# Altium PCB LEDSEQUENCER.PcbDoc
Units mm, origin at the board's own origin, x right, y up, seen from the top; angles counter-clockwise.
Board outline 60 x 23 mm, 2 copper layers (Top Layer, Bottom Layer), stack 1.671 mm thick; 28 components, 26 nets, 77 pads, 18 vias.
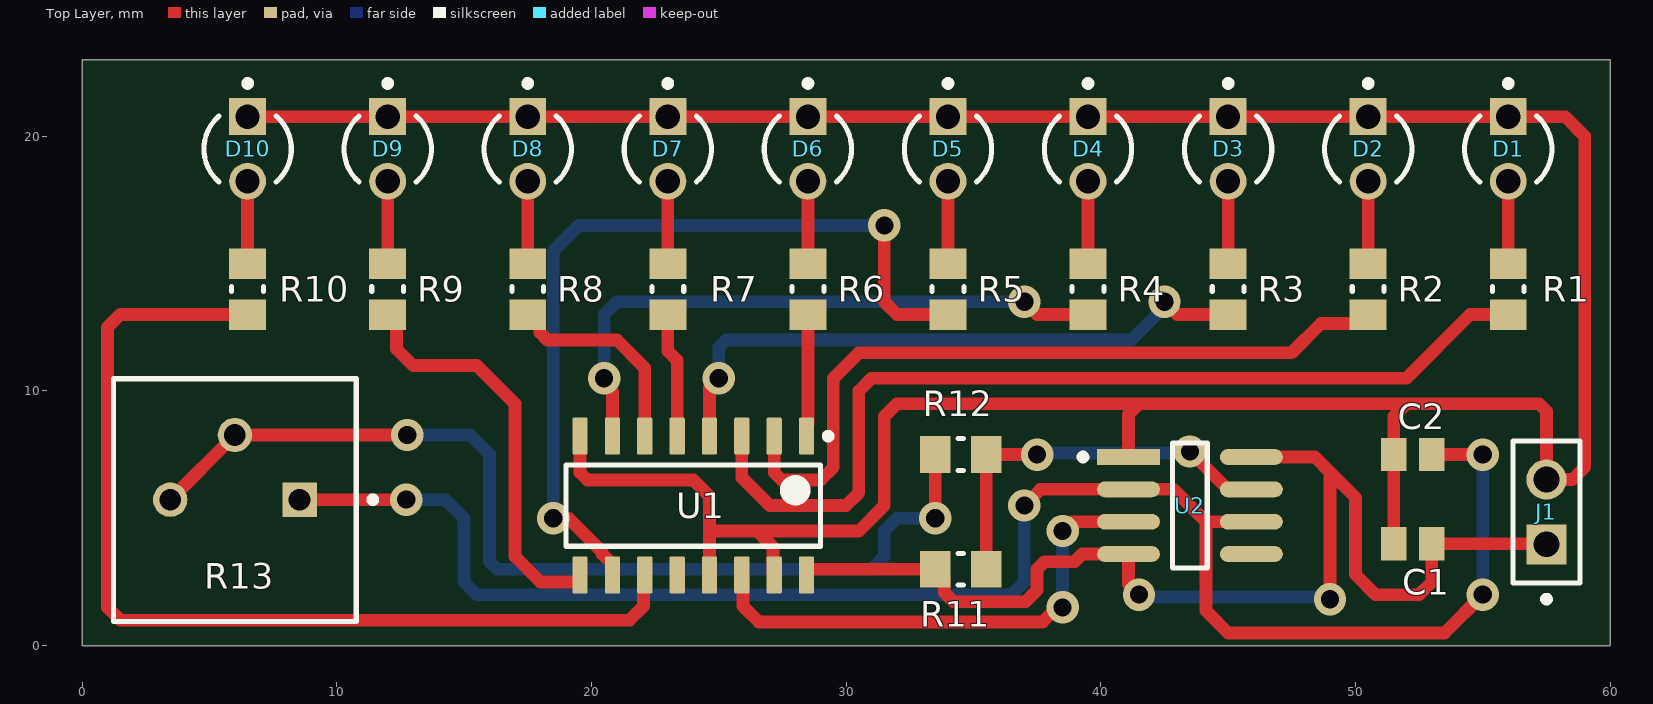
[diagram p0: Top Layer view]
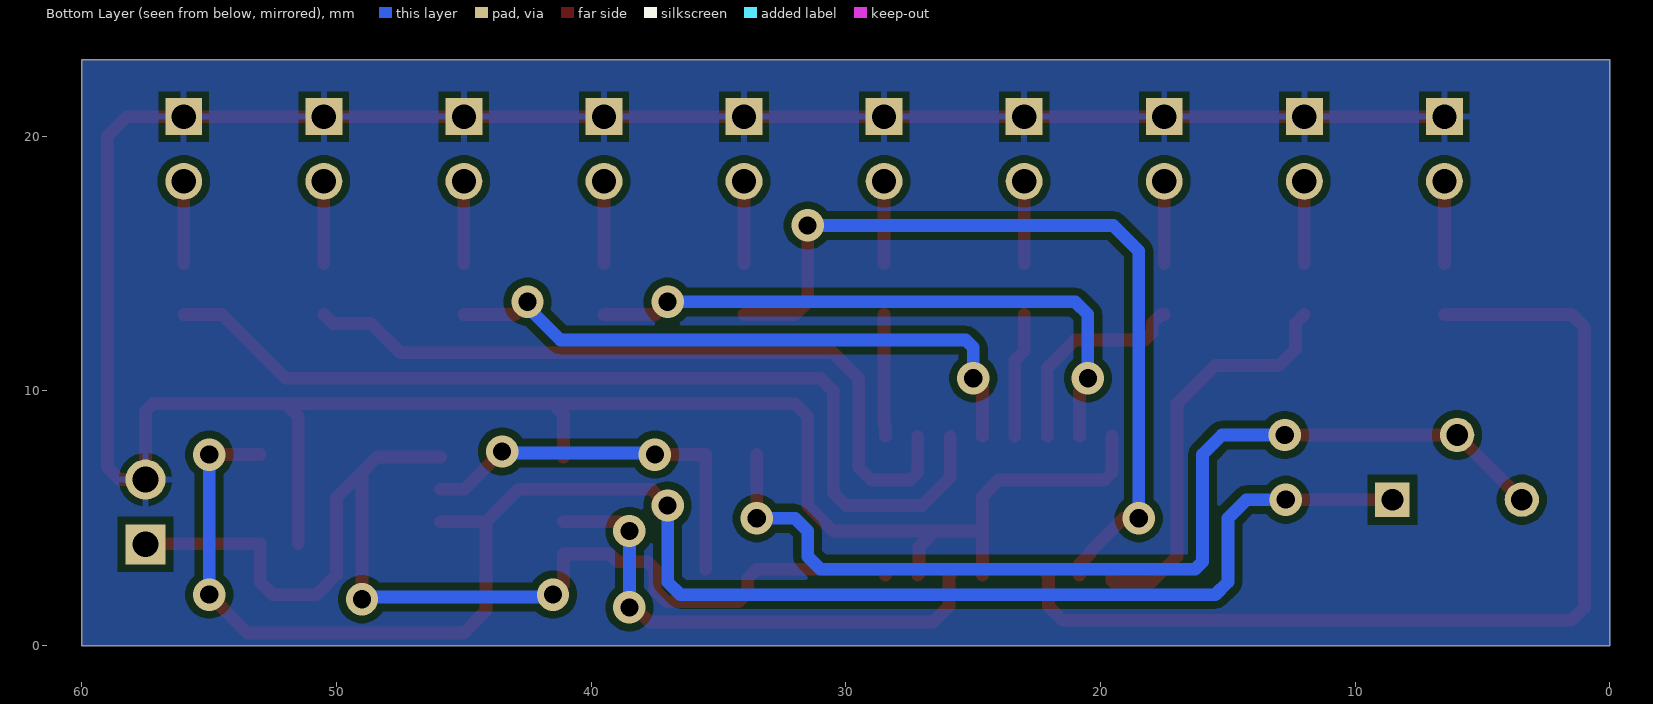
[diagram p1: Bottom Layer view, seen from below]
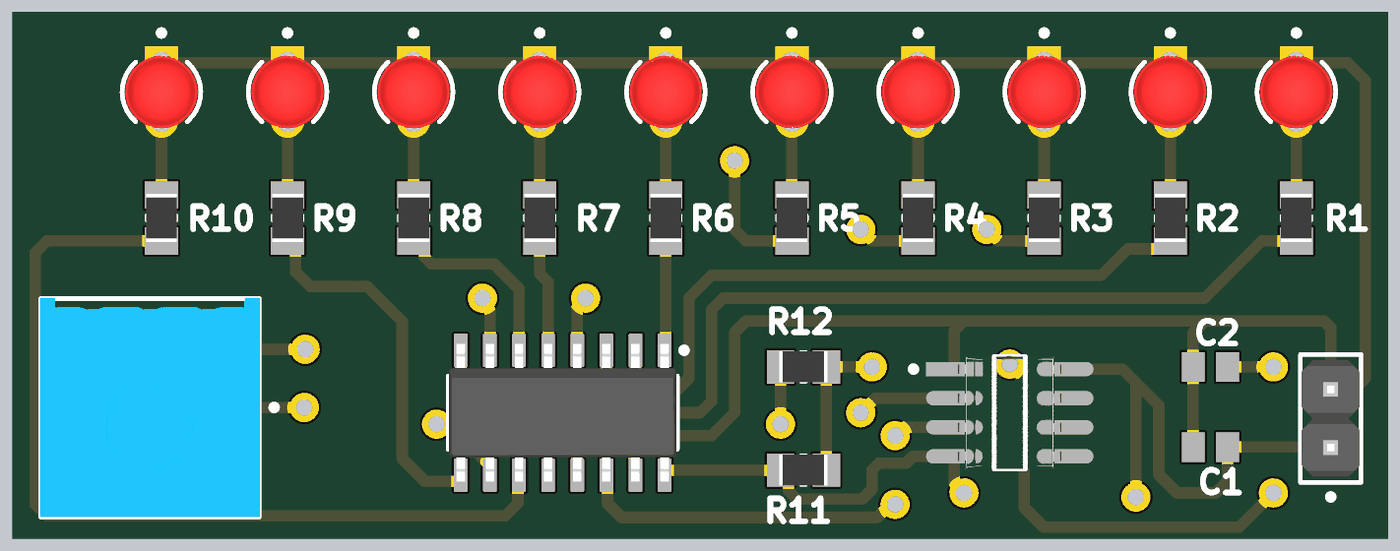
[diagram p2: 3D render of the assembled board from above, using the file's embedded part models]

## Layer stack, top to bottom
Top Solder: solder mask 0.0102, Solder Resist, Dk 3.5
Top Layer: signal copper 0.0356
Dielectric 1: dielectric 1.6, FR-4, Dk 4.8
Bottom Layer: signal copper 0.0356
Bottom Solder: solder mask 0.0102, Solder Resist, Dk 3.5

## Board outline
0,0 60,0 60,23 0,23

## Design rules (kind name [scope] priority, off if disabled: settings)
Clearance [All] p1: gap=0.3 ignorepadtopadclearanceinfootprint=FALSE
PolygonConnect [All] p1: connectstyle=Relief reliefconductorwidth=0.254 reliefentries=4 polygonreliefangle="90 Angle" airgapwidth=0.254
RoutingVias [All] p1: holewidth=0.3 width=0.6 viastyle="Through Hole" minholewidth=0.3 minwidth=0.6 maxholewidth=0.3 maxwidth=0.6
SilkToSolderMaskClearance [IsPad] p1: minsilkscreentomaskgap=0.1 clearancetoexposedcopper=TRUE
SolderMaskExpansion [All] p1: expansion=0.102 istentingtop=FALSE
UnRoutedNet [All] p1: checkbadconnections=TRUE
Width [All] p1: maxlimit=1 minlimit=0.3 preferedwidth=0.5
28 further rules are at their usual default settings.

## Components (designator, comment, footprint, x,y, rotation, side; value= is the part's Value field where it differs from the comment)
C1 "1uf" CAPC2013X135X45LL10T25 52.25,4 r0 top
C2 "1uf" CAPC2013X135X45LL10T25 52.25,7.5 r0 top
D1 "HLMP-1301" FP-HLMP-1301-MFG 56,19.5 r270 top
D2 "HLMP-1301" FP-HLMP-1301-MFG 50.5,19.5 r270 top
D3 "HLMP-1301" FP-HLMP-1301-MFG 45,19.5 r270 top
D4 "HLMP-1301" FP-HLMP-1301-MFG 39.5,19.5 r270 top
D5 "HLMP-1301" FP-HLMP-1301-MFG 34,19.5 r270 top
D6 "HLMP-1301" FP-HLMP-1301-MFG 28.5,19.5 r270 top
D7 "HLMP-1301" FP-HLMP-1301-MFG 23,19.5 r270 top
D8 "HLMP-1301" FP-HLMP-1301-MFG 17.5,19.5 r270 top
D9 "HLMP-1301" FP-HLMP-1301-MFG 12,19.5 r270 top
D10 "HLMP-1301" FP-HLMP-1301-MFG 6.5,19.5 r270 top
J1 "M20-9990246" FP-M20-9990246-MFG 57.5,5.25 r90 top
R1 "RC0805FR-071KL" RESC2013X60X35ML10T20 56,14 r90 top
R2 "RC0805FR-071KL" RESC2013X60X35ML10T20 50.5,14 r90 top
R3 "RC0805FR-071KL" RESC2013X60X35ML10T20 45,14 r90 top
R4 "RC0805FR-071KL" RESC2013X60X35ML10T20 39.5,14 r90 top
R5 "RC0805FR-071KL" RESC2013X60X35ML10T20 34,14 r90 top
R6 "RC0805FR-071KL" RESC2013X60X35ML10T20 28.5,14 r90 top
R7 "RC0805FR-071KL" RESC2013X60X35ML10T20 23,14 r90 top
R8 "RC0805FR-071KL" RESC2013X60X35ML10T20 17.5,14 r90 top
R9 "RC0805FR-071KL" RESC2013X60X35ML10T20 12,14 r90 top
R10 "RC0805FR-071KL" RESC2013X60X35ML10T20 6.5,14 r90 top
R11 "2k2" RESC2013X60X35ML10T20 34.5,3 r180 top
R12 "10k" RESC2013X60X35ML10T20 34.5,7.5 r0 top
R13 "50k" BOUR-3386P 6,7 r180 top
U1 "CD4017BM" D0016A_N 24,5.5 r270 top
U2 "NE555DR" FP-D0008A-IPC_A 43.5,5.5 r0 top

## Footprints (in the part's own frame and the unit in brackets; to place one, negate y for a bottom-side part, rotate by r counter-clockwise, add the part's x,y. Pads: shape width x height; smd on the part's side, far side on the other; paste and mask are expansions set on the pad)
BOUR-3386P [mm] "THD, 3-Leads, Body 9.53x9.53mm, Pitch 2.54mm"
  rect 1.35x1.35 hole 0.85: 1(-2.54,1.27)
  round 1.35 hole 0.85: 2(0,-1.27) 3(2.54,1.27)
  silkscreen extent -5.54,-3.48 4.76,6.05, body extent -4.79,-3.52 4.79,6.06, height 4.95
CAPC2013X135X45LL10T25 [mm] "Chip Capacitor, 2-Leads, Body 2.00x1.25mm, IPC High Density"
  rect 1x1.3 smd: 1(-0.75,0) 2(0.75,0)
  body extent -1.05,-0.67 1.05,0.68, height 1.35
D0016A_N [mm] "SOIC, 16-Leads, Body 10x4mm, Pitch 1.27mm, IPC Medium Density"
  rrect17% 1.45x0.6 smd: 1(-2.725,4.445) 2(-2.725,3.175) 3(-2.725,1.905) 4(-2.725,0.635) 5(-2.725,-0.635) 6(-2.725,-1.905) 7(-2.725,-3.175) 8(-2.725,-4.445) 9(2.725,-4.445) 10(2.725,-3.175) 11(2.725,-1.905) 12(2.725,-0.635) 13(2.725,0.635) 14(2.725,1.905) 15(2.725,3.175) 16(2.725,4.445)
  silkscreen extent -2.85,-5 1.6,5.42, body extent -3,-4.95 3,4.95, height 1.59
FP-D0008A-IPC_A [mm]
  rect 2.469x0.622 smd paste+0 mask+0: 1(-2.414,1.905)
  rrect100% 2.469x0.622 smd paste+0 mask+0: 2(-2.414,0.635) 3(-2.414,-0.635) 4(-2.414,-1.905) 5(2.414,-1.905) 6(2.414,-0.635) 7(2.414,0.635) 8(2.414,1.905)
  silkscreen extent -4.32,-2.45 0.68,2.45, body extent -4.15,-2.95 4.15,2.95, height 0.25
FP-HLMP-1301-MFG [mm]
  rect 1.45x1.45 hole 0.95 paste-1000 mask+0: 1(-1.27,0)
  round 1.45 hole 0.95 paste-1000 mask+0: 2(1.27,0)
  silkscreen extent -2.7,-1.71 1.3,1.71, body extent -2.22,-2.22 2.22,2.22, height 0.25
FP-M20-9990246-MFG [mm]
  rect 1.57x1.57 hole 1.02 paste-1000 mask+0: 1(-1.27,0)
  round 1.57 hole 1.02 paste-1000 mask+0: 2(1.27,0)
  silkscreen extent -3.55,-1.32 2.79,1.32, body extent -2.89,-1.42 2.89,1.42, height 0.25
RESC2013X60X35ML10T20 [mm] "Chip Resistor, 2-Leads, Body 2.1x1.35mm, IPC Low Density"
  rect 1.2x1.45 smd: 1(-1,0) 2(1,0)
  silkscreen extent -0.1,-0.63 0.1,0.63, body extent -1.05,-0.68 1.05,0.67, height 0.6

## Part data
C1 C2: library part CMP-1036-04761-2, Manufacturer=Murata, Part Number=GRM21BR71H105KA12L
D1 D2 D3 D4 D5 D6 D7 D8 D9 D10: library part CMP-18399-000007-1, "LED RED DIFFUSED T-1 T/H", Colour=Red, Forward Current=10mA, Forward Voltage=1.9V, Manufacturer=Broadcom, Max Junction Temp=+110°C, Package=0, Reverse Voltage=5V, Temperature="-40°C to +100°C", Temperature Range High=+100°C, Temperature Range Low=-40°C, Automotive=No, Category=Diode, ComponentLink2Description=Datasheet, ComponentLink2URL=https://docs.broadcom.com/docs/AV02-1555EN, Device Class L1=Optoelectronics, Device Class L2=LEDs, Device Class L3=unset, Digikey Description="LED RED DIFFUSED T-1 T/H", Lead Free=Yes, Led Orientation=Straight, Luminous Intensity=3.4mcd, Manufacturer Part Number=HLMP-1301, Mouser Description="Standard LEDs - Through Hole Red Diffused 635nm 3.4mcd", Octopart=https://octopart.com/hlmp-1301-broadcom-71130345, Peak Emmision Wavelength=635nm, RoHS=TRUE, Viewing Angle=60°, Wavelength=626nm
J1: library part CMP-15831-000009-1, "CONN HEADER VERT 2POS 2.54MM", Current Rating=3A, Manufacturer=Harwin, Temperature="-40°C to +105°C", Temperature Range High=+105°C, Temperature Range Low=-40°C, Automotive=No, Category=Conn, ComponentLink2Description=Datasheet, ComponentLink2URL=https://cdn.harwin.com/pdfs/M20-999.pdf, Conn Gender=Male, Conn Orientation=Vertical, Contact Material=Tin,Nickel, Device Class L1=Connectors, Device Class L2="Headers and Wire Housings", Device Class L3=unset, Digikey Description="CONN HEADER VERT 2POS 2.54MM", Height=8.99mm, Lead Free=Yes, Manufacturer Part Number=M20-9990246, Mouser Description="2.54mm (0.1\") Pitch SIL Vertical PC Tail Pin Header, 6.1mm mating pin height, tin, 2 contacts", Number Of Contacts=2, Number Of Rows=1, Octopart=https://octopart.com/m20-9990246-harwin-2590635, Package=M20-9990246, Pitch=2.54mm, RoHS=TRUE
R1 R2 R3 R4 R5 R6 R7 R8 R9 R10 R11 R12: library part CMP-2100-03671-1, "Chip Resistor, 1 KOhm, +/- 1%, 125 mW, -55 to 155 degC, 0805 (2012 Metric), RoHS, Tape and Reel", Case Code (Imperial)=0805, Case Code (Metric)=2012, Manufacturer=Yageo, Max Operating Temperature=155degC, Max Power Dissipation=125mW, Min Operating Temperature=-55degC, Package Description="2-Pin Surface Mounted Device, Body 2 x 1.25 mm", Package Quantity=1, Resistance=1KOhm, Temperature Coefficient=100ppm/degreesC, Tolerance=1%, Voltage Rating=150V, Case/Package=0805, Composition=ThickFilm, Datasheet URL=http://www.yageo.com/NewPortal/yageodocoutput?fileName=/pdf/R-Chip/PYu-RC_Group_51_RoHS_L_5.pdf, Datasheet Version="Rev. 5, 10/2016", Depth=1.25mm, Height=0.024inch, Lead Free=LeadFree, Length=0.079inch, Manufacturer URL=http://www.yageo.com/, Military Standard=Not, Number of Pins=2, Number of Terminations=2, Package Reference=0805, Packaging=TapeandReel, Power Rating=125mW, REACH SVHC=Unknown, RoHSCompliant=true, Termination=SMD/SMT, Voltage Rating (DC)=150V, Width=0.049inch
R13: library part CMP-2000-05592-1, "Square Trimpot(R) Trimming Potentiometer, 100 KOhm, +/- 10%, 0.5 W, -55 to 125 degC, 3-Pin THD, RoHS, Tube", Manufacturer=Bourns, Manufacturer Series=3386, Maximum Operating Temperature=125C, Minimum Operating Temperature=-55C, Operating Temperature-Max (Cel)=125, Operating Temperature-Min (Cel)=-55, Package=RectangularPackage, Package Description="3-Pin Through Hole Device, Body 9.53 x 9.53 mm, Pitch 2.54 mm", Package Reference=3386P, Power Rating=1/2W, Rated Power Dissipation (P) (W)=0.5, Rated Temperature (Cel)=85, Resistance (ohm)=100000, Resistance Law=Linear, Resistance Value=100KOhm, Resistive Element Material=Cermet, Temperature Coefficient=100ppm/C, Tolerance=10%, Tolerance (%)=10, Actuator Orientation=Vertical, Actuator Type=Screw, Datasheet URL=http://www.bourns.com/docs/Product-Datasheets/3386.pdf, Datasheet Version=05/2016, Family=3386, Lead Free=NO, Manufacturer URL=http://www.bourns.com/, Mounting=ThroughHole, Mounting Feature=ThroughHole, Mounting Technology=ThroughHole, Number of Terminals=3, Number of Turns=1, Packaging=Tube, Product Depth=9.53mm, Product Height=4.83mm, Product Length=9.53mm, Product Type=Potentiometer, Shaft Diameter=3.15mm, Technology=Cermet, Terminal Finish=TINLEAD, Terminal Shape=WIRE, Termination Style=Pin, Type=Trimmer
U1: library part CMP-1623-00071-2, "CMOS Decade Counter with 10 Decoded Outputs, D0016A, TUBE", F @ Nom Voltage(Max)(Mhz)=8, Generic Part Number=CD4017B, ICC @ Nom Voltage(Max)(mA)=0.03, Manufacturer="Texas Instruments", Operating Temperature Range(C)="-55 to 125", Rating=Military, tpd @ Nom Voltage(Max)(ns)=270, Voltage(Nom)(V)=10, Bits(#)=10, Code_JEDEC="MS-012 variation AC", DatasheetVersion=SCHS027C, Function=Counter, Input Type=CMOS, Inputs=1, Output Drive (IOL/IOH)(Max)(mA)=1.5/-1.5, Output Type=CMOS, PackageReference=D0016A, Schmitt Trigger=No, Technology Family=CD4000, Type=Decade, VCC(Max)(V)=18, VCC(Min)(V)=3
U2: library part CMP-1685-00007-2, "IC OSC SGL TIMER 100KHZ 8-SOIC", Case/Package=SOIC, Frequency=100kHz, High Level Output Current=-200mA, Low Level Output Current=200mA, Max Operating Temperature=70°C, Max Supply Voltage=16V, Min Operating Temperature=0°C, Min Supply Voltage=4.5V, Operating Supply Current=10mA, Package Quantity=2500, Quiescent Current=15mA, Contact Plating=Gold, Height=1.58mm, Lead Free="Lead Free", Length=4.9mm, Mount="Surface Mount", Number of Pins=8, Number of Timers/Counters=1, Packaging="Tape and Reel", Radiation Hardening=No, REACH SVHC="No SVHC", Weight=0.002561oz, Width=3.91mm

## Via types
v1: diameter 1.27, hole 0.711, Top Layer to Bottom Layer, 18 vias

## Nets (pads, with @x,y where several pads share a name; then routed paths per layer and width w, separated by ;. In a path a pad name is that pad's centre, name@x,y a point inside that pad or via, vN(x,y) a via of type N, cw(c..) or ccw(c..) an arc to the next point about the centre after c; other vN are vias at no path point)
GND: C1.1 C2.1 D1.1 D2.1 D3.1 D4.1 D5.1 D6.1 D7.1 D8.1 D9.1 D10.1 J1.2 U1.8 U1.13 U1.15 U2.1 | length 127.7
  Top Layer w0.5: D10.1 6.5,20.5 6.77,20.77 D9.1 D8.1 D7.1 D6.1 D5.1 D4.1 D3.1 D2.1 D1.1 58.23,20.77 59,20 59,7 58.52,6.52 J1.2 57.5,9.207 57.207,9.5 52,9.5 ; U1.8 19.555,6.793 19.848,6.5 24,6.5 24.635,5.865 24.635,4.5 ; U1.13 24.635,4.5 ; U1.15 27.125,2.825 27.125,3.875 27,4 26.5,4.5 ; U2.1 41.086,9.086 41.5,9.5 ; C1.1 C2.1 51.5,9 52,9.5 ; 24.635,4.5 26.5,4.5 ; 26.5,4.5 30.5,4.5 31.5,5.5 31.5,9 32,9.5 41.5,9.5 ; 41.5,9.5 52,9.5
NetC2_2: C2.2 R13.1 U2.2 U2.6 | length 67.2
  Top Layer w0.5: R13.1 v1(12.73,5.73) ; v1(37,5.5) 37.635,6.135 U2.2 42.865,6.135 44.135,4.865 ; U2.6 44.135,4.865 ; C2.2 v1(55,7.5) ; v1(55,2) 53.5,0.5 45,0.5 44.129,1.371 44.129,4.049 44.135,4.055 44.135,4.865
  Bottom Layer w0.5: v1(12.73,5.73) 14.27,5.73 15,5 15,2.5 15.5,2 36.5,2 37,2.5 v1(37,5.5) ; v1(55,2) v1(55,7.5)
NetD1_2: D1.2 R1.2 | length 3.2
  Top Layer w0.5: R1.2 D1.2
NetD2_2: D2.2 R2.2 | length 3.2
  Top Layer w0.5: R2.2 D2.2
NetD3_2: D3.2 R3.2 | length 3.2
  Top Layer w0.5: R3.2 D3.2
NetD4_2: D4.2 R4.2 | length 3.2
  Top Layer w0.5: R4.2 D4.2
NetD5_2: D5.2 R5.2 | length 3.2
  Top Layer w0.5: R5.2 D5.2
NetD6_2: D6.2 R6.2 | length 3.2
  Top Layer w0.5: R6.2 D6.2
NetD7_2: D7.2 R7.2 | length 3.2
  Top Layer w0.5: R7.2 D7.2
NetD8_2: D8.2 R8.2 | length 3.2
  Top Layer w0.5: R8.2 D8.2
NetD9_2: D9.2 R9.2 | length 3.2
  Top Layer w0.5: R9.2 D9.2
NetD10_2: D10.2 R10.2 | length 3.2
  Top Layer w0.5: R10.2 D10.2
NetR1_1: R1.1 U1.3 | length 37.6
  Top Layer w0.5: U1.3 25.905,6.595 27,5.5 30,5.5 30.5,6 30.5,10 31,10.5 52,10.5 54.5,13 R1.1
NetR2_1: R2.1 U1.2 | length 29.6
  Top Layer w0.5: U1.2 27.175,6.793 27.468,6.5 29,6.5 29.5,7 29.5,10.5 30.5,11.5 47.5,11.5 48.65,12.65 50.15,12.65 R2.1
NetR3_1: R3.1 U1.4 | length 24.7
  Top Layer w0.5: U1.4 24.635,10.135 v1(25,10.5) ; v1(42.5,13.5) 43,13 R3.1
  Bottom Layer w0.5: v1(25,10.5) 25,11.707 25.293,12 41.208,12 42.5,13.292 v1(42.5,13.5)
NetR4_1: R4.1 U1.7 | length 24.3
  Top Layer w0.5: v1(20.5,10.5) 20.5,10.292 20.825,9.967 U1.7 ; v1(37,13.5) 37.5,13 R4.1
  Bottom Layer w0.5: v1(20.5,10.5) 20.5,13 21,13.5 v1(37,13.5)
NetR5_1: R5.1 U1.10 | length 33.2
  Top Layer w0.5: v1(18.5,5) 19.103,5 20.406,3.696 20.406,3.619 20.825,3.2 U1.10 ; v1(31.5,16.5) 31.5,13.5 32,13 R5.1
  Bottom Layer w0.5: v1(18.5,5) 18.5,15.5 19.5,16.5 v1(31.5,16.5)
NetR6_1: R6.1 U1.1 | length 4.8
  Top Layer w0.5: U1.1 28.445,8.65 28.5,8.705 R6.1
NetR7_1: R7.1 U1.5 | length 4.9
  Top Layer w0.5: R7.1 23,11.572 23.365,11.207 U1.5
NetR8_1: R8.1 U1.6 | length 8.4
  Top Layer w0.5: R8.1 17.625,13 17.975,12.65 17.975,12.293 18.268,12 21,12 22.095,10.905 U1.6
NetR9_1: R9.1 U1.9 | length 16.3
  Top Layer w0.5: R9.1 12.35,12.65 12.35,11.65 13,11 15.5,11 17,9.5 17,3.5 18,2.5 19.505,2.5 19.555,2.55 U1.9
NetR10_1: R10.1 U1.11 | length 39.4
  Top Layer w0.5: R10.1 1.5,13 1,12.5 1,1.5 1.5,1 21.5,1 22.045,1.545 22.045,2.725 U1.11
NetR11_1: R11.1 R12.2 U2.7 | length 15.6
  Top Layer w0.5: R11.1 R12.2 v1(37.5,7.5) ; v1(43.5,7.625) 44.99,6.135 U2.7
  Bottom Layer w0.5: v1(37.5,7.5) 37.563,7.563 43.437,7.563 v1(43.5,7.625)
NetR12_1: R12.1 R13.2 R13.3 | length 39.7
  Top Layer w0.5: R13.3 R13.2 v1(12.77,8.27) ; v1(33.5,5) R12.1
  Bottom Layer w0.5: v1(12.77,8.27) 15.23,8.27 16,7.5 16,3.293 16.293,3 31,3 31.5,3.5 31.5,4.5 32,5 v1(33.5,5)
NetU1_14: U1.14 U2.3 | length 20
  Top Layer w0.5: U1.14 25.955,2.725 25.955,1.545 26.575,0.925 37.717,0.925 38.292,1.5 v1(38.5,1.5) ; v1(38.5,4.5) 38.865,4.865 U2.3
  Bottom Layer w0.5: v1(38.5,1.5) v1(38.5,4.5)
VCC: C1.2 J1.1 R11.2 U1.16 U2.4 U2.8 | length 46.6
  Top Layer w0.5: U1.16 28.445,2.95 28.495,3 R11.2 33.85,2.65 33.85,2.093 34.218,1.725 37.049,1.725 37.5,2.176 37.5,3 37.793,3.293 38.969,3.293 39.271,3.595 U2.4 41.086,2.414 v1(41.5,2) ; U2.8 48.405,7.405 49,6.81 ; v1(49,1.819) 49,6.81 ; J1.1 57.48,4 C1.2 53,2.5 52.5,2 50.793,2 50,2.793 50,5.81 49,6.81
  Bottom Layer w0.5: v1(41.5,2) 41.591,1.909 48.909,1.909 v1(49,1.819)
pads on no net: U1.12 U2.5

## Polygon pours and split planes (outlines as drawn)
GND on Bottom Layer "GND_L02_P000" (solid, pour order 0): 0,0 60,0 60,22.928 59.929,22.999 -0.008,22.999 -0.008,0.019 0.016,-0.005